# EAGLE board high-ripple-vcf-en90-11 (EAGLE 6.6.0)
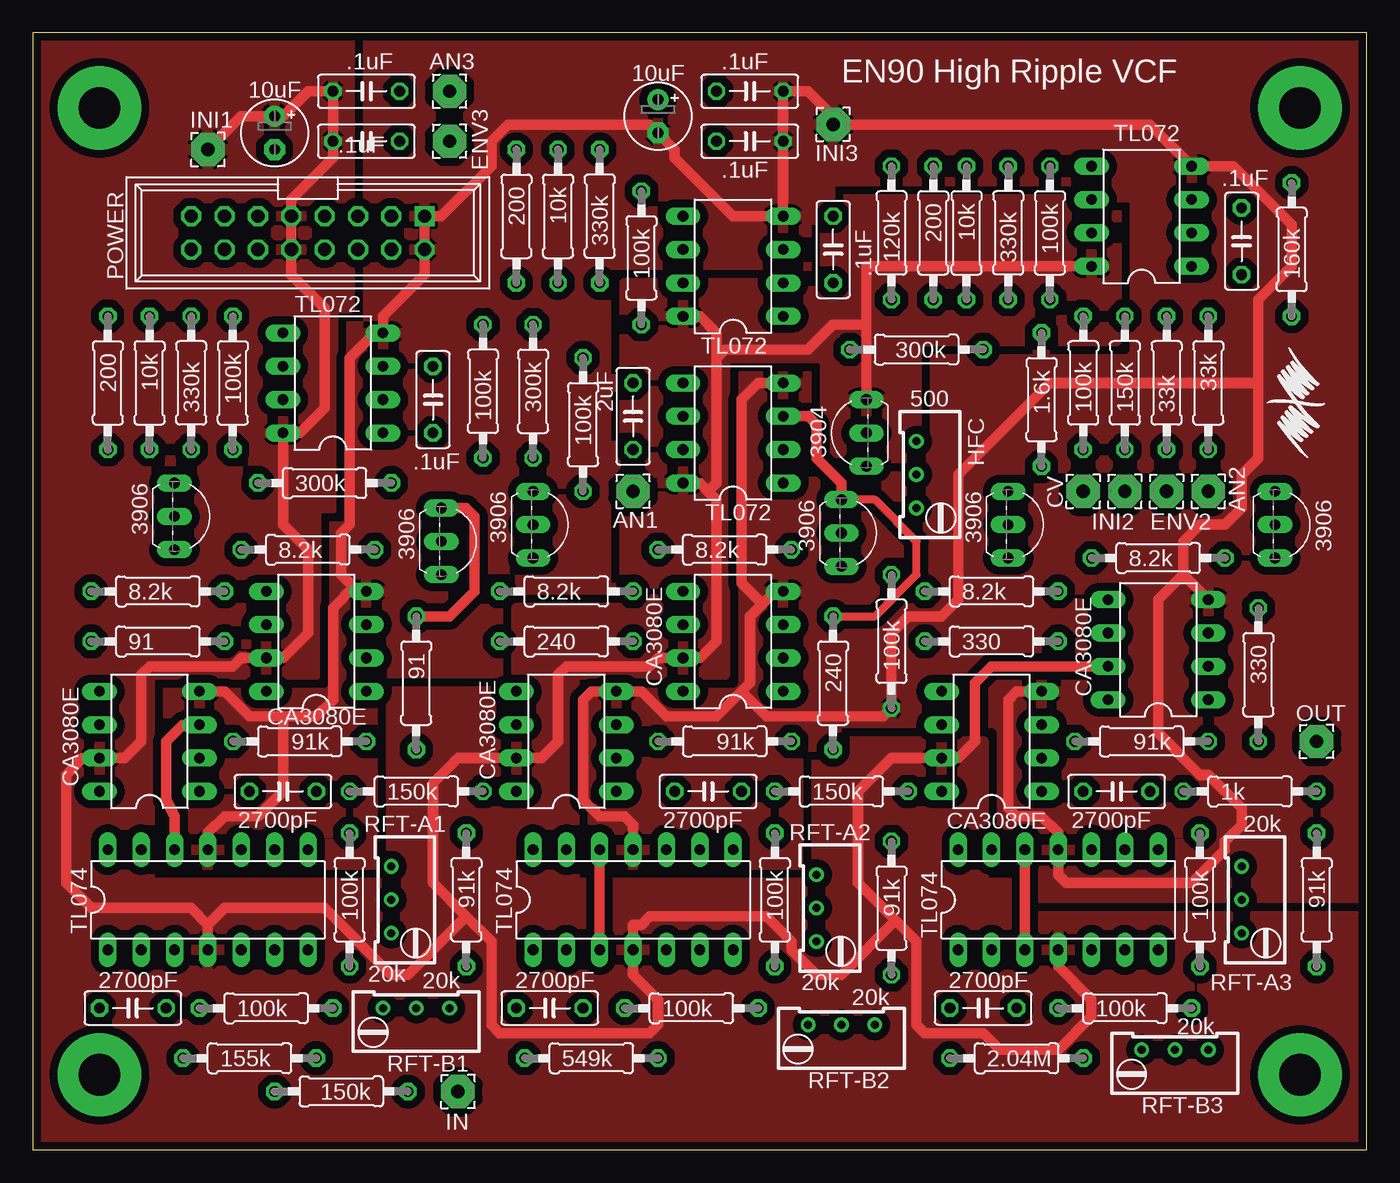
[diagram p0: board, top side]
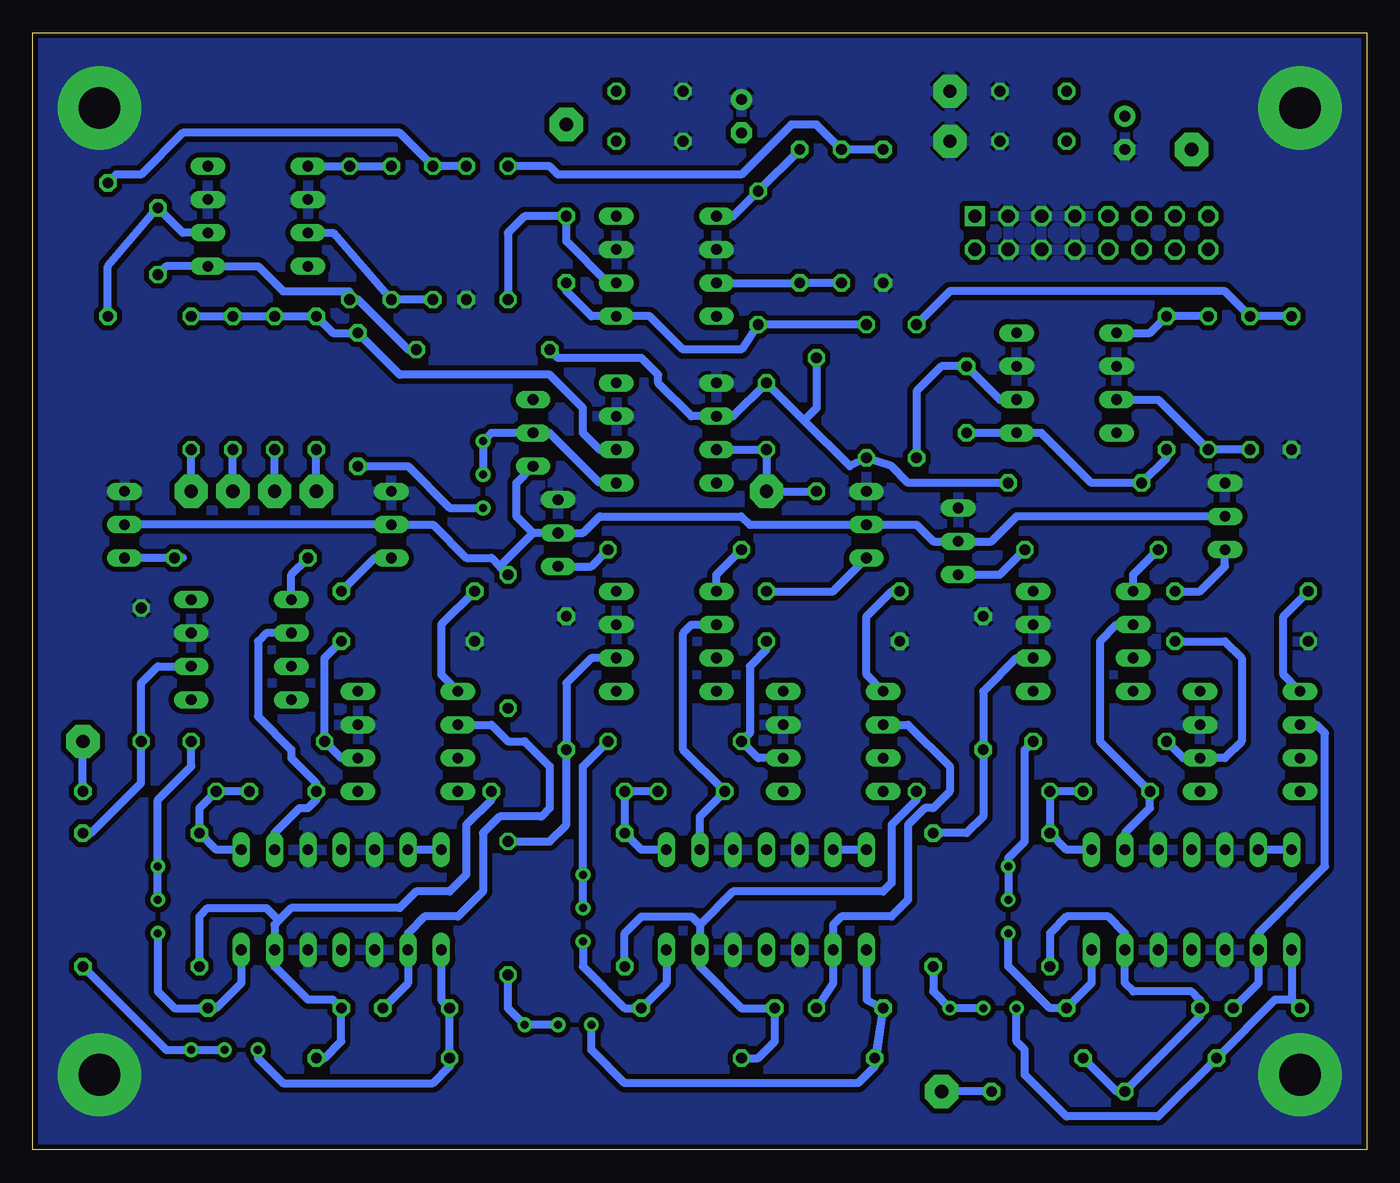
[diagram p1: board, bottom side, seen from below]

Size 101.6 x 85.09 mm. Coordinates in mm from the lower left corner, seen from the top.
Outline: 0,0 101.6,0 101.6,85.09 0,85.09 0,0
Copper layers (1*16): Top 0.035mm / dielectric 1.5mm / Bottom 0.035mm
Design rules "SeeedStudio_2layer_DRU_no_angle_20140221": minimum track width 6mil, minimum drill 12mil, track to track 6mil, track to pad 6mil, pad to pad 6mil, via to via 6mil, smd to smd 0mil, copper to edge 10mil, drill to drill 10mil, minimum pad ring 10mil, minimum via ring 6mil, stop-mask expansion 2mil, vias tented up to drill 100mil, thermal gap 10mil

## Footprints (pad centres in the part's own frame; a part is rotated, then mirrored left to right if it is on the bottom)
2,54/1,0 = drill 1.016 pad 2.54 octagon: 1 0,0
C050-025X075 = drill 0.813 octagon: 1 -2.54,0; 2 2.54,0
E2,5-5 = drill 0.813 pad 1.6: + -1.27,0 | drill 0.813 pad 1.6 octagon: - 1.27,0
RTRIM64W = drill 0.61: 1 1.27,-2.54; 2 1.27,0; 3 1.27,2.54
DIL14 = drill 0.813 long: 1 -7.62,-3.81; 2 -5.08,-3.81; 3 -2.54,-3.81; 4 0,-3.81; 5 2.54,-3.81; 6 5.08,-3.81; 7 7.62,-3.81; 8 7.62,3.81; 9 5.08,3.81; 10 2.54,3.81; 11 0,3.81; 12 -2.54,3.81; 13 -5.08,3.81; 14 -7.62,3.81
DIL08 = drill 0.813 long: 1 -3.81,-3.81; 2 -1.27,-3.81; 3 1.27,-3.81; 4 3.81,-3.81; 5 3.81,3.81; 6 1.27,3.81; 7 -1.27,3.81; 8 -3.81,3.81
PINSHRD_PTH_2X8 = drill 1.016 octagon: +5V@1 3.81,1.27; +5V@2 3.81,-1.27; +12V@1 1.27,1.27; +12V@2 1.27,-1.27; -12V@1 -8.89,1.27; CV@1 6.35,1.27; CV@2 6.35,-1.27; GATE@1 8.89,1.27; GATE@2 8.89,-1.27; GND@1 -6.35,1.27; GND@2 -6.35,-1.27; GND@3 -3.81,1.27; GND@4 -3.81,-1.27; GND@5 -1.27,1.27; GND@6 -1.27,-1.27 | drill 1.016 square: -12V@2 -8.89,-1.27
0207/10 = drill 0.813 octagon: 1 -5.08,0; 2 5.08,0
TO92-EBC = drill 0.813 long: B 0,-1.27; C 2.54,-1.27; E -2.54,-1.27

## Placement (x,y rotation side)
AN1  [2,54/1,0]  45.72,50.16 90 top
AN2  [2,54/1,0]  89.53,50.16 0 top
AN3  [2,54/1,0]  31.75,80.64 90 top
C1  .1uF  [C050-025X075]  25.4,80.64 0 top
C2  .1uF  [C050-025X075]  54.61,76.83 0 top
C3  .1uF  [C050-025X075]  25.4,76.83 0 top
C4  .1uF  [C050-025X075]  54.61,80.64 0 top
C5  10uF  [E2,5-5]  18.41,77.47 270 top
C6  10uF  [E2,5-5]  47.62,78.74 270 top
C7  2700pF  [C050-025X075]  7.62,10.79 180 top
C8  2700pF  [C050-025X075]  19.05,27.3 0 top
C9  .1uF  [C050-025X075]  30.48,57.15 270 top
C10  2uF  [C050-025X075]  45.72,55.88 270 top
C11  .1uF  [C050-025X075]  60.96,68.58 270 top
C12  .1uF  [C050-025X075]  92.08,69.22 270 top
C13  2700pF  [C050-025X075]  39.37,10.79 180 top
C14  2700pF  [C050-025X075]  51.44,27.3 0 top
C15  2700pF  [C050-025X075]  72.39,10.79 180 top
C16  2700pF  [C050-025X075]  82.55,27.3 0 top
CV  [2,54/1,0]  80.01,50.16 0 top
ENV2  [2,54/1,0]  86.36,50.16 0 top
ENV3  [2,54/1,0]  31.75,76.83 90 top
HFC  500  [RTRIM64W]  68.58,51.44 180 top
IC1  TL074  [DIL14]  13.34,19.05 0 top
IC2  TL072  [DIL08]  53.34,54.61 90 top
IC3  TL072  [DIL08]  22.86,58.42 90 top
IC4  CA3080E  [DIL08]  8.89,31.11 90 top
IC5  CA3080E  [DIL08]  21.59,38.73 90 top
IC6  TL072  [DIL08]  53.34,67.31 90 top
IC7  TL072  [DIL08]  84.45,71.12 90 top
IC8  TL074  [DIL14]  45.72,19.05 0 top
IC9  CA3080E  [DIL08]  40.64,31.11 90 top
IC10  CA3080E  [DIL08]  53.34,38.73 90 top
IC11  TL074  [DIL14]  78.11,19.05 0 top
IC12  CA3080E  [DIL08]  73.03,31.11 90 top
IC13  CA3080E  [DIL08]  85.72,38.1 90 top
IN  [2,54/1,0]  32.38,4.45 90 top
INI1  [2,54/1,0]  13.34,76.2 90 top
INI2  [2,54/1,0]  83.19,50.16 0 top
INI3  [2,54/1,0]  60.96,78.11 90 top
OUT  [2,54/1,0]  97.79,31.11 90 top
POWER  EURORACK-POWER  [PINSHRD_PTH_2X8]  20.95,69.85 180 top
R1  100k  [0207/10]  80.01,58.42 90 top
R2  150k  [0207/10]  83.19,58.42 90 top
R3  33k  [0207/10]  86.36,58.42 90 top
R4  1.6k  [0207/10]  76.83,57.15 270 top
R5  33k  [0207/10]  89.53,58.42 270 top
R6  8.2k  [0207/10]  9.53,42.55 0 top
R7  8.2k  [0207/10]  20.95,45.72 0 top
R8  8.2k  [0207/10]  40.64,42.55 0 top
R9  8.2k  [0207/10]  52.7,45.72 0 top
R10  8.2k  [0207/10]  73.03,42.55 0 top
R11  8.2k  [0207/10]  85.72,45.09 0 top
R12  100k  [0207/10]  65.41,38.73 90 top
R13  150k  [0207/10]  23.5,4.45 180 top
R14  100k  [0207/10]  17.78,10.79 0 top
R15  91k  [0207/10]  20.32,31.11 180 top
R16  100k  [0207/10]  24.13,19.05 270 top
R17  150k  [0207/10]  29.21,27.3 0 top
R18  91k  [0207/10]  33.02,19.05 270 top
R19  100k  [0207/10]  50.16,10.79 0 top
R20  100k  [0207/10]  15.24,58.42 270 top
R21  330k  [0207/10]  12.06,58.42 90 top
R22  10k  [0207/10]  8.89,58.42 270 top
R23  200  [0207/10]  5.71,58.42 270 top
R24  300k  [0207/10]  22.23,50.8 0 top
R25  100k  [0207/10]  41.91,55.24 270 top
R27  91k  [0207/10]  52.7,31.11 180 top
R28  91k  [0207/10]  65.41,18.41 270 top
R29  100k  [0207/10]  46.35,67.94 270 top
R30  330k  [0207/10]  43.18,71.12 90 top
R31  10k  [0207/10]  40.01,71.12 270 top
R32  200  [0207/10]  36.83,71.12 270 top
R33  300k  [0207/10]  38.1,57.78 270 top
R34  100k  [0207/10]  77.47,69.85 270 top
R35  330k  [0207/10]  74.3,69.85 90 top
R36  10k  [0207/10]  71.12,69.85 270 top
R37  200  [0207/10]  68.58,69.85 270 top
R38  300k  [0207/10]  67.31,60.96 180 top
R39  100k  [0207/10]  56.52,19.05 270 top
R40  150k  [0207/10]  61.59,27.3 0 top
R41  100k  [0207/10]  83.19,10.79 0 top
R42  91k  [0207/10]  84.45,31.11 180 top
R43  91k  [0207/10]  97.79,19.05 270 top
R44  100k  [0207/10]  88.9,19.05 270 top
R45  1k  [0207/10]  92.71,27.3 0 top
RA-A1  91  [0207/10]  9.53,38.73 0 top
RA-A2  240  [0207/10]  40.64,38.73 0 top
RA-A3  330  [0207/10]  73.03,38.73 0 top
RA-B1  91  [0207/10]  29.21,35.56 270 top
RA-B2  240  [0207/10]  60.96,35.56 270 top
RA-B3  330  [0207/10]  93.34,36.2 270 top
RFT-A1  20k  [RTRIM64W]  28.57,19.05 180 top
RFT-A2  20k  [RTRIM64W]  60.96,18.41 180 top
RFT-A3  20k  [RTRIM64W]  93.34,19.05 180 top
RFT-B1  20k  [RTRIM64W]  29.21,9.53 90 top
RFT-B2  20k  [RTRIM64W]  61.59,8.26 90 top
RFT-B3  20k  [RTRIM64W]  87,6.35 90 top
RQ1  155k  [0207/10]  16.51,6.99 0 top
RQ2  549k  [0207/10]  42.55,6.99 0 top
RQ3  2.04M  [0207/10]  74.93,6.99 0 top
RT1  100k  [0207/10]  34.29,57.78 90 top
RT2  120k  [0207/10]  65.41,69.85 90 top
RT3  160k  [0207/10]  95.89,68.58 90 top
T1  3904  [TO92-EBC]  62.23,54.61 90 top
T2  3906  [TO92-EBC]  12.06,48.26 270 top
T3  3906  [TO92-EBC]  32.38,46.35 270 top
T4  3906  [TO92-EBC]  39.37,47.62 270 top
T5  3906  [TO92-EBC]  62.87,46.99 270 top
T6  3906  [TO92-EBC]  75.56,47.62 270 top
T7  3906  [TO92-EBC]  95.89,47.62 270 top

## Library data of the parts
AN1-AN3 CV ENV2 ENV3 IN INI1-INI3 OUT = wirepad
C1-C16 HFC R1-R25 R27-R45 RA-A1-RA-A3 RA-B1-RA-B3 RFT-A1-RFT-A3 RFT-B1-RFT-B3 RQ1-RQ3 RT1-RT3 = rcl
IC1-IC13 POWER = mmoretti
T1-T7 = transistor-neu-to92

## Nets
+12V: C1.1 C3.1 C5.+ IC1.4 IC2.8 IC3.8 IC4.7 IC5.7 IC6.8 IC7.8 IC8.4 IC9.7 IC10.7 IC11.4 IC12.7 IC13.7 INI1.1 POWER.+12V@1 POWER.+12V@2 T1.C
-12V: C2.2 C4.2 C6.- IC1.11 IC2.4 IC3.4 IC4.4 IC5.4 IC6.4 IC7.4 IC8.11 IC9.4 IC10.4 IC11.11 IC12.4 IC13.4 INI3.1 POWER.-12V@1 POWER.-12V@2 R12.1
A: IC4.5 R6.1
B: IC5.5 R7.1
C: IC9.5 R8.1
D: IC10.5 R9.1
E: IC12.5 R10.1
GND: AN3.1 C1.2 C2.1 C3.2 C4.1 C5.- C6.+ ENV3.1 IC1.3 IC1.5 IC1.10 IC1.12 IC2.3 IC2.5 IC3.3 IC3.6 IC4.3 IC5.3 IC6.3 IC6.6 IC7.3 IC7.6 IC8.3 IC8.5 IC8.10 IC8.12 IC9.3 IC10.3 IC11.3 IC11.5 IC11.10 IC11.12 IC12.3 IC13.3 POWER.GND@1 POWER.GND@2 POWER.GND@3 POWER.GND@4 POWER.GND@5 POWER.GND@6 R23.2 R32.2 R37.2 RA-A1.1 RA-A2.1 RA-A3.1 RA-B1.1 RA-B2.1 RA-B3.1 T2.E T3.E T4.E T5.E T6.E T7.E
N$1: C10.1 IC2.6 R24.2 R25.1 R33.2 R38.2
N$2: CV.1 R1.1
N$3: INI2.1 R2.1
N$4: ENV2.1 R3.1
N$5: AN2.1 R5.2
N$6: IC2.2 R1.2 R2.2 R3.2 R4.1 R5.1
N$7: HFC.3 R4.2
N$8: HFC.1 HFC.2 IC2.1 T1.B
N$9: R12.2 T1.E T2.B T3.B T4.B T5.B T6.B T7.B
N$10: R6.2 T2.C
N$11: R7.2 T3.C
N$12: R8.2 T4.C
N$13: R9.2 T5.C
N$14: R10.2 T6.C
N$15: R11.2 T7.C
N$16: C9.2 IC3.1 R20.2 R24.1
N$17: IC3.5 R20.1 R21.2
N$18: IC3.7 R21.1 R22.2
N$19: R22.1 R23.1 RT1.2
N$20: C11.2 IC6.1 R29.2 R33.1
N$21: C9.1 IC3.2 RT1.1
N$22: IC6.5 R29.1 R30.2
N$23: IC6.7 R30.1 R31.2
N$24: R31.1 R32.1 RT2.2
N$25: C11.1 IC6.2 RT2.1
N$26: C12.2 IC7.1 R34.2 R38.1
N$27: IC7.5 R34.1 R35.2
N$28: IC7.7 R35.1 R36.2
N$29: R36.1 R37.1 RT3.2
N$30: C12.1 IC7.2 RT3.1
N$31: C8.2 IC1.8 R16.1 R17.1
N$32: IC8.7 R19.2 RFT-A2.3
N$33: R27.1 RFT-A2.1 RFT-A2.2
N$34: IC9.2 R27.2 RA-A2.2
N$35: C13.1 IC8.2 IC9.6
N$36: IC1.7 R14.2 RFT-A1.3
N$37: R15.1 RFT-A1.1 RFT-A1.2
N$38: IC4.2 R15.2 RA-A1.2
N$39: C7.1 IC1.2 IC4.6
N$40: C7.2 IC1.1 RFT-B1.3 RQ1.1
N$41: C13.2 IC8.1 RFT-B2.3 RQ2.1
N$42: R18.2 RFT-B1.1 RFT-B1.2
N$43: IC5.2 R18.1 RA-B1.2
N$44: C8.1 IC1.9 IC5.6
N$45: IC1.6 R13.2 R14.1 R16.2 RQ1.2
N$46: IC1.13 IC1.14
N$47: R28.2 RFT-B2.1 RFT-B2.2
N$48: IC10.2 R28.1 RA-B2.2
N$49: C14.1 IC8.9 IC10.6
N$50: IC8.6 R17.2 R19.1 R39.2 RQ2.2
N$51: IC8.13 IC8.14
N$52: C14.2 IC8.8 R39.1 R40.1
N$53: IC11.7 R41.2 RFT-A3.3
N$54: R42.1 RFT-A3.1 RFT-A3.2
N$55: IC12.2 R42.2 RA-A3.2
N$56: C15.1 IC11.2 IC12.6
N$57: C15.2 IC11.1 RFT-B3.3 RQ3.1
N$58: R43.2 RFT-B3.1 RFT-B3.2
N$59: IC13.2 R43.1 RA-B3.2
N$60: C16.1 IC11.9 IC13.6
N$61: IC11.6 R40.2 R41.1 R44.2 RQ3.2
N$62: IC11.13 IC11.14
N$63: C16.2 IC11.8 R44.1 R45.1
N$64: IN.1 R13.1
N$65: OUT.1 R45.2
N$66: IC13.5 R11.1
X: AN1.1 C10.2 IC2.7 R25.2

## Tracks (layer width: path | path; a pad name or v marks a point on that pad's centre or on a via)
+12V
  Top 0.813: INI1.1 15.88,78.74 C5.+ 19.05,78.74 20.95,80.64 C1.1 C3.1 22.86,75.56 19.68,72.39 POWER.+12V@2 POWER.+12V@1 19.68,66.67 22.23,64.14 22.23,56.52 20.32,54.61 IC3.8 19.05,47.62 20.95,45.72 20.95,39.37 19.05,37.47 IC5.7 15.88,37.47 15.24,36.83 8.89,36.83 8.26,36.2 8.26,31.11 6.99,29.84 IC4.7 3.81,29.84 2.54,28.57 2.54,20.32 4.45,18.41 12.06,18.41 13.34,17.14 | 13.34,17.14 IC1.4 | 13.34,17.14 14.61,18.41 22.23,18.41 27.3,13.34 28.57,13.34 33.02,17.78 | 33.02,17.78 30.48,20.32 30.48,27.94 32.38,29.84 IC9.7 38.73,29.84 40.01,31.11 40.01,36.2 40.64,36.83 46.99,36.83 47.62,37.47 IC10.7 50.8,37.47 52.07,38.73 52.07,49.53 51.44,50.16 | 51.44,50.16 50.8,50.8 IC2.8 | IC6.8 50.8,63.5 52.07,62.23 52.07,60.33 | 52.07,60.33 52.07,50.8 51.44,50.16 | 65.72,17.46 61.59,13.34 59.69,13.34 57.78,15.24 57.78,15.88 55.88,17.78 46.99,17.78 46.35,17.14 45.72,17.14 IC8.4 45.72,13.34 47.62,11.43 47.62,9.53 46.99,8.89 35.56,8.89 34.92,9.53 34.92,15.88 33.02,17.78 | 65.72,17.46 62.87,20.32 62.87,27.3 65.41,29.84 IC12.7 70.48,29.84 71.75,31.11 71.75,35.56 73.03,36.83 IC13.7 | IC7.8 63.5,67.31 63.5,62.87 | T1.C 63.5,62.87 | 63.5,62.87 60.96,62.87 59.05,60.96 52.7,60.96 52.07,60.33 | IC11.4 78.11,13.97 80.64,11.43 80.64,10.16 78.11,7.62 73.66,7.62 72.39,8.89 67.94,8.89 67.31,9.53 67.31,15.88 65.72,17.46
  pour Top (isolate 0.61): 0,85.09 24.13,85.09 24.13,64.14 22.86,64.14 22.86,48.9 21.59,48.9 21.59,36.2 0,36.2
  pour Top (isolate 0.61): 0,36.2 8.89,36.2 8.89,20.32 39.37,20.32 39.37,0 0,0
  pour Top (isolate 0.61): 39.37,20.32 76.2,20.32 76.2,17.78 101.6,17.78 101.6,0 39.37,0
  pour Top (isolate 0.61): 27.3,20.32 27.3,34.92 36.83,34.92 36.83,41.27 45.09,41.27 45.09,66.04 52.7,66.04 52.7,36.2 41.27,36.2 41.27,20.32
  pour Top (isolate 0.61): 52.7,60.33 60.33,60.33 60.33,52.7 67.31,52.7 67.31,61.59 82.55,61.59 82.55,72.39 60.33,72.39 60.33,66.04 52.7,66.04 52.7,65.41
  pour Top (isolate 0.61): 59.69,19.68 59.69,31.11 72.39,31.11 72.39,20.32 73.03,20.32 73.03,19.68
-12V
  Top 0.813: 24.45,42.86 23.5,43.81 23.5,46.99 24.13,47.62 24.13,60.33 26.04,62.23 IC3.4 26.67,63.5 29.84,66.67 POWER.-12V@1 POWER.-12V@2 31.11,71.12 34.92,74.93 34.92,76.83 36.2,78.11 46.99,78.11 C6.- 48.9,76.2 48.9,75.56 53.34,71.12 IC6.4 C2.2 C4.2 59.05,80.64 60.96,78.74 INI3.1 85.09,78.11 IC7.4 91.44,74.93 95.89,70.48 95.89,67.31 93.34,64.77 93.34,58.42 | 24.45,42.86 24.77,42.55 IC5.4 | IC4.4 14.61,34.92 16.51,33.02 19.05,33.02 | 19.05,33.02 21.59,33.02 22.86,34.29 22.86,41.27 24.45,42.86 | IC1.11 13.34,24.13 14.61,25.4 17.14,25.4 19.05,27.3 19.05,33.02 | 93.34,58.42 93.34,52.7 92.08,51.44 92.08,48.9 90.81,47.62 88.9,47.62 87.63,46.35 87.63,43.81 | 87.63,43.81 IC13.4 | 87.63,43.81 85.72,41.91 85.72,31.75 88.9,28.57 89.53,28.57 92.08,26.04 92.08,24.77 90.81,23.5 90.81,22.86 88.27,20.32 78.74,20.32 78.11,20.95 IC11.11 78.11,24.13 76.83,25.4 74.93,25.4 74.3,26.04 74.3,34.29 74.93,34.92 IC12.4 | 93.34,58.42 77.47,58.42 70.48,51.44 70.48,41.91 69.22,40.64 66.67,40.64 65.41,39.37 R12.1 64.77,33.02 55.88,33.02 53.98,34.92 | IC10.4 56.52,42.55 55.56,41.59 | 55.56,41.59 54.61,40.64 54.61,35.56 53.98,34.92 | 53.98,34.92 52.07,33.02 48.26,33.02 46.35,34.92 IC9.4 42.55,34.92 41.91,34.29 41.91,26.67 43.18,25.4 45.09,25.4 45.72,24.77 IC8.11 | IC2.4 55.24,58.42 53.98,57.15 53.98,43.18 55.56,41.59
  pour Top (isolate 0.61, rank 2): 24.77,85.09 24.77,63.5 22.86,63.5 22.86,48.26 21.59,48.26 21.59,36.2 8.89,36.2 8.89,20.32 26.67,20.32 26.67,34.92 36.2,34.92 36.2,41.91 45.09,41.91 45.09,66.67 60.33,66.67 60.33,72.39 82.55,72.39 82.55,60.96 67.94,60.96 67.94,52.7 60.33,52.7 60.33,59.69 52.7,59.69 52.7,35.56 40.64,35.56 40.64,20.32 59.69,20.32 59.69,31.11 72.39,31.11 72.39,20.32 74.3,20.32 74.3,18.41 101.6,18.41 101.6,85.09
A
  Bottom 0.61: IC4.5 6.35,36.2 6.35,40.64 R6.1
B
  Bottom 0.61: IC5.5 17.78,43.81 R7.1
C
  Bottom 0.61: IC9.5 38.1,36.2 38.1,40.64 36.2,42.55 R8.1
D
  Bottom 0.61: IC10.5 49.53,43.81 R9.1
E
  Bottom 0.61: R10.1 70.48,40.01 70.48,36.2 IC12.5
GND  (via drill 3.17 pad 6.35)
  Top 0.61: RA-B2.1 64.14,40.64 67.31,43.81 67.31,46.35 64.14,49.53 T5.E
  Top 0.813: RA-B1.1 31.75,40.64 33.66,42.55 33.66,48.26 33.02,48.9 T3.E | T5.E 61.59,50.8 59.69,52.7 59.69,55.24 59.05,55.88 IC2.3 | IC1.12 10.79,25.4 10.16,26.67 10.16,31.11 11.43,32.38 IC4.3 | IC11.12 IC11.3 | IC8.3 IC8.12
  other vias: 5.08,79.38 96.52,79.38 96.52,5.71 5.08,5.71
  pour Bottom (isolate 0.406): 0,85.09 101.6,85.09 101.6,0 0,0
N$1
  Bottom 0.61: R24.2 34.92,50.8 36.2,52.07 R33.2 39.37,52.07 42.86,55.56 | 42.86,55.56 C10.1 48.26,55.88 IC2.6 51.44,55.88 53.98,58.42 53.98,59.05 55.24,60.33 61.59,60.33 R38.2 | R25.1 41.91,56.52 42.86,55.56
N$2
  Bottom 0.61: CV.1 R1.1
N$3
  Bottom 0.61: INI2.1 R2.1
N$4
  Bottom 0.61: ENV2.1 R3.1
N$5
  Bottom 0.61: AN2.1 R5.2
N$6
  Bottom 0.61: R5.1 R3.2 R2.2 R1.2 78.74,62.23 R4.1 73.66,59.05 62.23,59.05 59.69,56.52 59.69,54.61 58.42,53.34 IC2.2
N$7
  Bottom 0.61: R4.2 73.03,52.07 69.85,48.9 HFC.3
N$8
  Bottom 0.61: IC2.1 58.42,50.8 62.23,54.61 T1.B 66.67,54.61 HFC.1 HFC.2
N$9
  Bottom 0.61: T7.B T6.B 71.12,47.62 68.58,45.09 66.67,45.09 66.04,44.45 | 66.04,44.45 R12.2 | 63.5,46.99 T5.B 59.69,46.99 58.42,48.26 47.62,48.26 46.99,47.62 T4.B 34.29,47.62 33.02,46.35 T3.B 28.57,46.35 26.67,48.26 T2.B | 63.5,46.99 66.04,44.45 | 63.5,46.99 64.77,48.26 64.77,50.8 T1.E
N$10
  Bottom 0.61: R6.2 12.7,42.55 10.79,44.45 T2.C
N$11
  Bottom 0.61: T3.C 27.94,43.81 R7.2
N$12
  Bottom 0.61: R8.2 40.64,42.55 T4.C
N$13
  Bottom 0.61: T5.C 59.05,44.45 R9.2
N$14
  Bottom 0.61: T6.C 75.56,45.09 R10.2
N$15
  Bottom 0.61: 90.17,45.09 R11.2 T7.C
N$16
  Bottom 0.61: R20.2 15.24,52.7 R24.1 20.95,50.8 24.77,54.61 IC3.1 C9.2
N$17
  Bottom 0.61: R21.2 R20.1 16.51,62.23 IC3.5
N$18
  Bottom 0.61: R22.2 R21.1 15.88,57.15 IC3.7
N$19
  Bottom 0.61: R23.1 R22.1 10.79,65.41 31.75,65.41 RT1.2
N$20
  Bottom 0.61: R33.1 R29.2 47.62,60.96 52.07,60.96 54.61,63.5 IC6.1 59.05,63.5 60.96,65.41 C11.2
N$21
  Bottom 0.61: IC3.2 27.94,57.15 C9.1 32.38,59.69 34.29,57.78 RT1.1
N$22
  Bottom 0.61: IC6.5 48.26,71.12 R29.1 R30.2
N$23
  Bottom 0.61: R31.2 R30.1 IC6.7
N$24
  Bottom 0.61: R32.1 R31.1 41.91,78.11 43.81,78.11 47.62,74.3 61.59,74.3 62.23,74.93 RT2.2
N$25
  Bottom 0.61: IC6.2 57.78,66.04 60.96,69.22 C11.1 64.14,71.12 65.41,69.85 RT2.1
N$26
  Bottom 0.61: C12.2 91.44,67.31 IC7.1 84.45,67.31 82.55,65.41 77.47,65.41 R34.2 76.83,64.77 73.03,60.96 R38.1
N$27
  Bottom 0.61: IC7.5 R34.1 R35.2
N$28
  Bottom 0.61: R36.2 R35.1 78.74,69.85 IC7.7
N$29
  Bottom 0.61: R37.1 R36.1 73.66,77.47 90.17,77.47 93.34,74.3 95.25,74.3 RT3.2
N$30
  Bottom 0.61: RT3.1 95.89,67.31 C12.1 90.17,69.85 IC7.2
N$31
  Bottom 0.61: C8.2 R17.1 R16.1 22.86,22.86 IC1.8
N$32
  Bottom 0.61: IC8.7 53.34,12.7 R19.2 56.52,10.79 59.69,13.97 RFT-A2.3
N$33
  Bottom 0.61: RFT-A2.2 RFT-A2.1 59.69,29.21 R27.1
N$34
  Bottom 0.61: IC9.2 46.35,29.84 R27.2 46.99,31.75 46.99,36.83 45.72,38.1 RA-A2.2
N$35
  Bottom 0.61: IC9.6 34.92,32.38 31.75,29.21 31.75,27.3 33.02,26.04 33.66,26.04 34.92,24.77 34.92,19.05 36.2,17.78 40.01,17.78 40.64,17.14 IC8.2 40.64,12.7 C13.1
N$36
  Bottom 0.61: IC1.7 20.95,12.7 R14.2 24.13,10.79 27.3,13.97 RFT-A1.3
N$37
  Bottom 0.61: RFT-A1.2 RFT-A1.1 27.3,22.23 26.04,23.5 26.04,30.48 R15.1
N$38
  Bottom 0.61: RA-A1.2 10.79,38.73 9.53,37.47 9.53,31.11 10.79,29.84 IC4.2 13.97,29.84 R15.2
N$39
  Bottom 0.61: C7.1 8.26,12.7 IC1.2 8.26,16.51 3.17,21.59 3.17,31.75 3.81,32.38 IC4.6
N$40
  Bottom 0.61: IC1.1 5.71,11.43 | 5.71,11.43 C7.2 | 5.71,11.43 6.99,11.43 RQ1.1 15.88,2.54 22.86,2.54 26.04,5.71 26.04,7.62 26.67,8.26 RFT-B1.3
N$41
  Bottom 0.61: IC8.1 38.1,11.43 C13.2 | C13.2 RQ2.1 | C13.2 37.47,6.35 38.73,5.08 56.52,5.08 59.05,7.62 RFT-B2.3
N$42
  Bottom 0.61: RFT-B1.2 RFT-B1.1 33.02,12.06 R18.2
N$43
  Bottom 0.61: IC5.2 26.67,37.47 29.21,34.92 RA-B1.2 29.21,25.4 30.48,24.13 R18.1
N$44
  Bottom 0.61: IC5.6 19.05,40.01 20.32,38.73 20.32,31.11 C8.1 16.51,26.04 18.41,24.13 IC1.9
N$45
  Bottom 0.61: R16.2 24.13,16.51 22.86,17.78 19.68,17.78 18.41,16.51 IC1.6 18.41,12.7 17.78,12.06 13.34,12.06 12.7,11.43 R14.1 12.7,10.16 R13.2 19.05,4.45 RQ1.2
N$46
  Bottom 0.61: IC1.14 IC1.13
N$47
  Bottom 0.61: RFT-B2.2 RFT-B2.1 65.41,10.79 R28.2
N$48
  Bottom 0.61: IC10.2 59.05,37.47 60.96,35.56 RA-B2.2 60.96,24.77 62.23,23.5 R28.1
N$49
  Bottom 0.61: IC8.9 50.8,25.4 C14.1 52.07,30.48 52.07,39.37 51.44,40.01 IC10.6
N$50
  Bottom 0.61: R17.2 34.29,26.67 36.2,24.77 36.2,20.32 36.83,19.68 48.26,19.68 50.8,17.14 | 50.8,17.14 IC8.6 50.8,13.97 47.62,10.79 R19.1 45.09,8.26 46.35,6.99 RQ2.2 | R39.2 56.52,16.51 55.24,17.78 51.44,17.78 50.8,17.14
N$51
  Bottom 0.61: IC8.14 IC8.13
N$52
  Bottom 0.61: C14.2 R40.1 R39.1 55.24,22.86 IC8.8
N$53
  Bottom 0.61: IC11.7 85.72,12.7 87.63,10.79 R41.2 90.81,10.79 92.08,12.06 RFT-A3.3
N$54
  Bottom 0.61: RFT-A3.2 RFT-A3.1 92.08,26.67 89.53,29.21 R42.1
N$55
  Bottom 0.61: IC12.2 78.11,29.84 R42.2 79.38,37.47 RA-A3.2
N$56
  Bottom 0.61: C15.1 73.03,12.7 IC11.2 73.03,16.51 71.75,17.78 69.22,17.78 67.31,19.68 67.31,24.13 66.04,25.4 62.87,25.4 62.23,26.04 62.23,29.21 64.14,31.11 65.41,31.11 66.67,32.38 IC12.6
N$57
  Bottom 0.61: RFT-B3.3 84.45,6.99 82.55,5.08 71.12,5.08 69.85,6.35 RQ3.1 C15.2 70.48,11.43 IC11.1
N$58
  Bottom 0.61: R43.2 91.44,7.62 RFT-B3.1 RFT-B3.2
N$59
  Bottom 0.61: R43.1 97.16,24.13 93.34,27.94 RA-B3.2 93.34,35.56 92.08,36.83 IC13.2
N$60
  Bottom 0.61: IC13.6 83.82,39.37 84.45,38.73 84.45,33.02 81.92,30.48 81.92,29.84 80.01,27.94 C16.1 80.01,26.67 80.64,26.04 81.28,26.04 83.19,24.13 IC11.9
N$61
  Bottom 0.61: R40.2 66.67,26.67 68.58,24.77 68.58,20.95 69.85,19.68 72.39,19.68 73.66,18.41 81.92,18.41 82.87,17.46 | 82.87,17.46 83.19,17.14 IC11.6 83.19,13.97 80.64,11.43 78.74,11.43 R41.1 78.11,8.26 79.38,6.99 RQ3.2 | R44.2 88.9,17.78 88.27,18.41 83.82,18.41 82.87,17.46
N$62
  Bottom 0.61: IC11.14 IC11.13
N$63
  Bottom 0.61: C16.2 R45.1 88.9,26.04 R44.1 87.63,22.86 IC11.8
N$64
  Bottom 0.61: R13.1 IN.1
N$65
  Bottom 0.61: R45.2 OUT.1
N$66
  Bottom 0.61: IC13.5 81.92,43.81 R11.1
X
  Bottom 0.61: IC2.7 C10.2 AN1.1 R25.2

## Text on the board
tPlace: EN90 High Ripple VCF